# Altium PCB STM32H743_PCB.PcbDoc (part 1 of 2)
Units mm, origin at the board's own origin, x right, y up, seen from the top; angles counter-clockwise.
Board outline 65 x 50 mm, 4 copper layers (Top, Signal, GND, Bottom), stack 0.603 mm thick; 86 components, 110 nets, 449 pads, 169 vias.
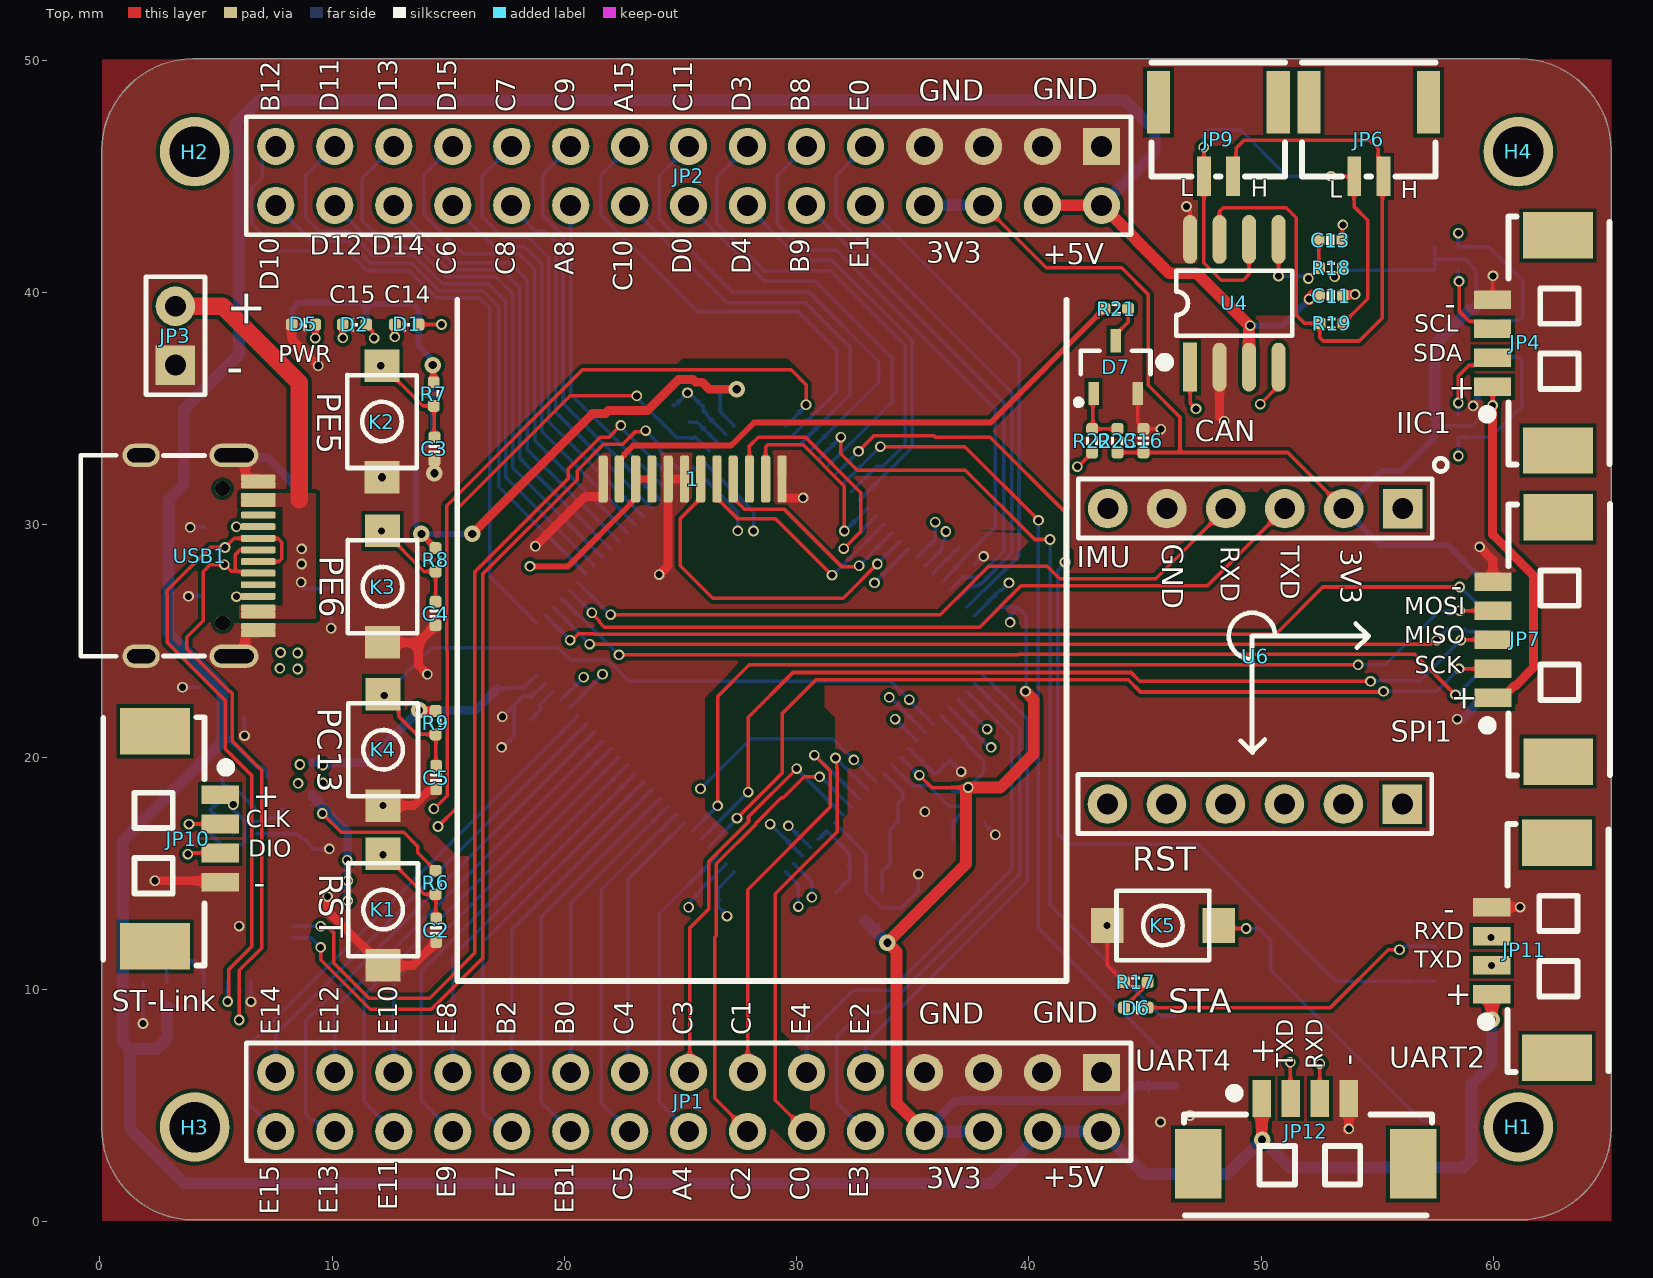
[diagram p0: Top view]
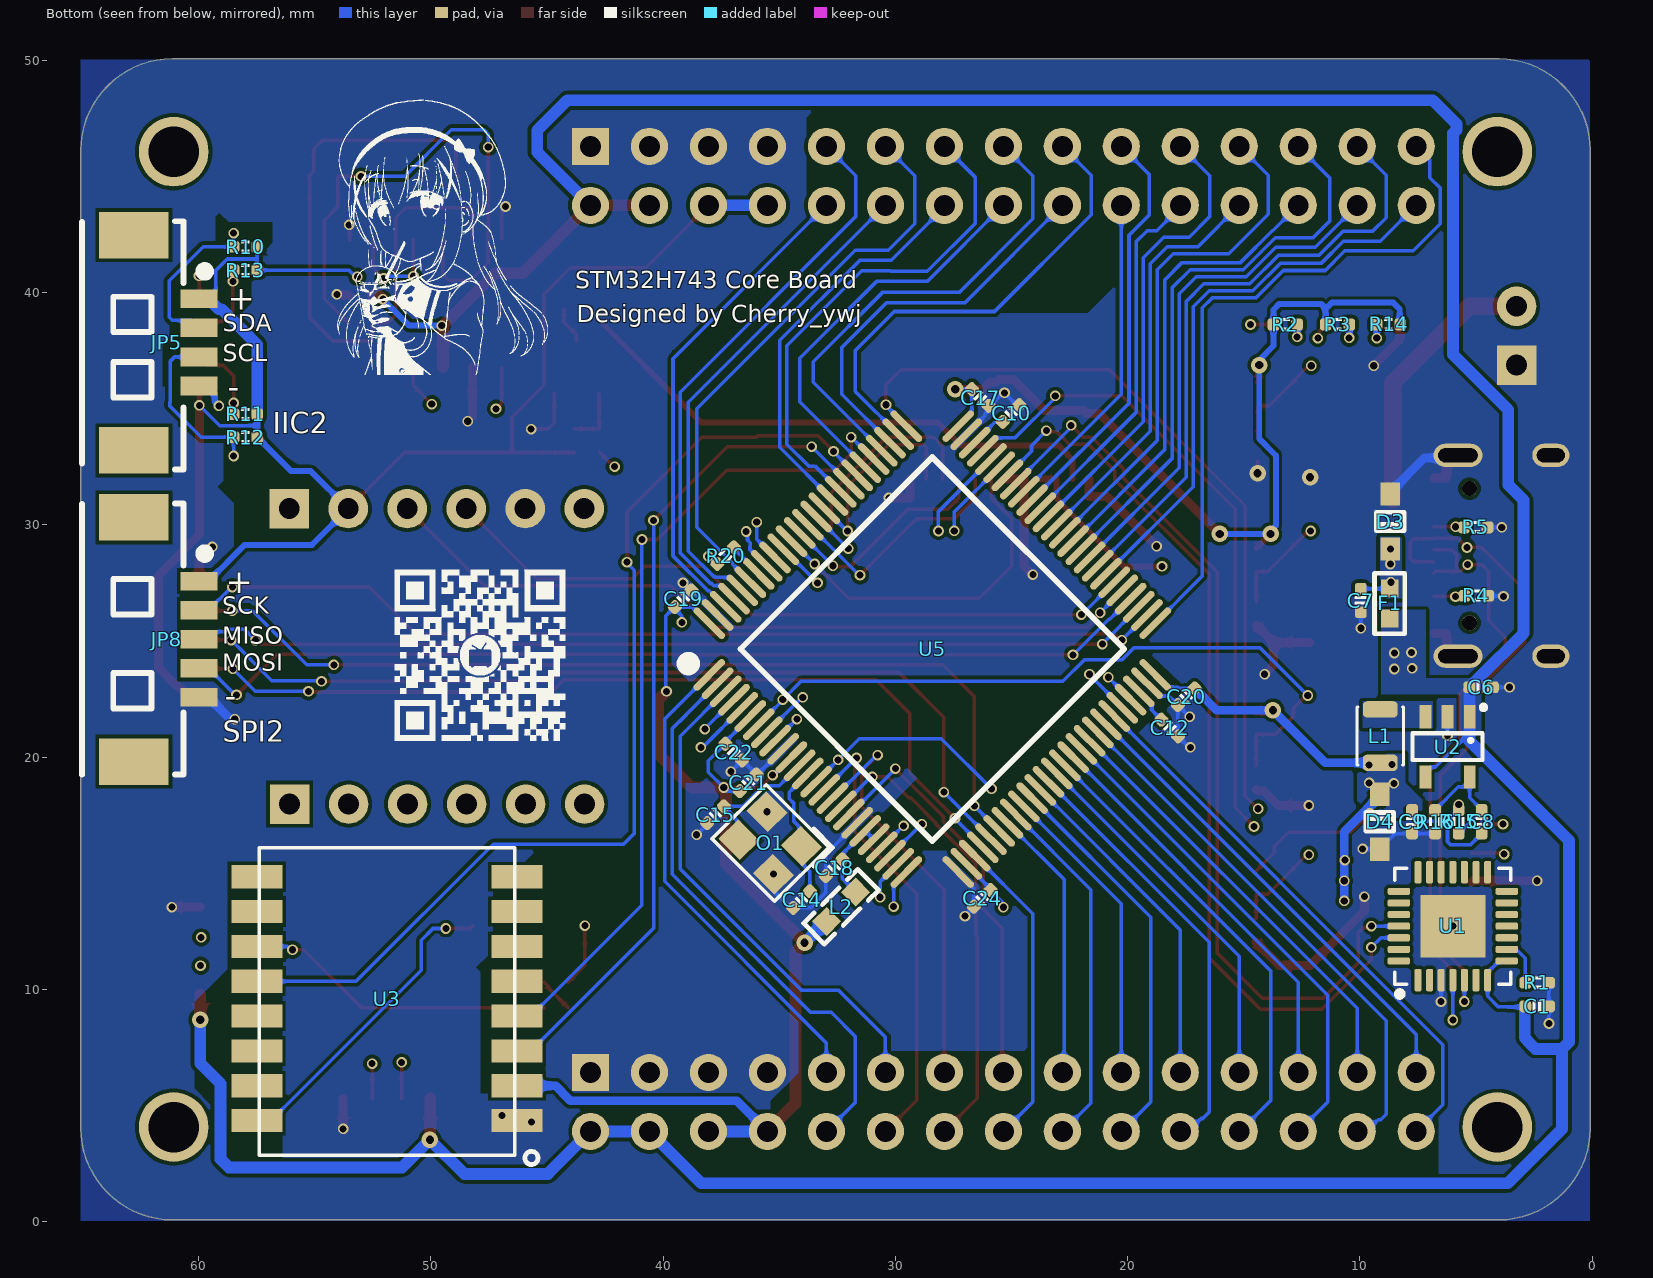
[diagram p1: Bottom view, seen from below]
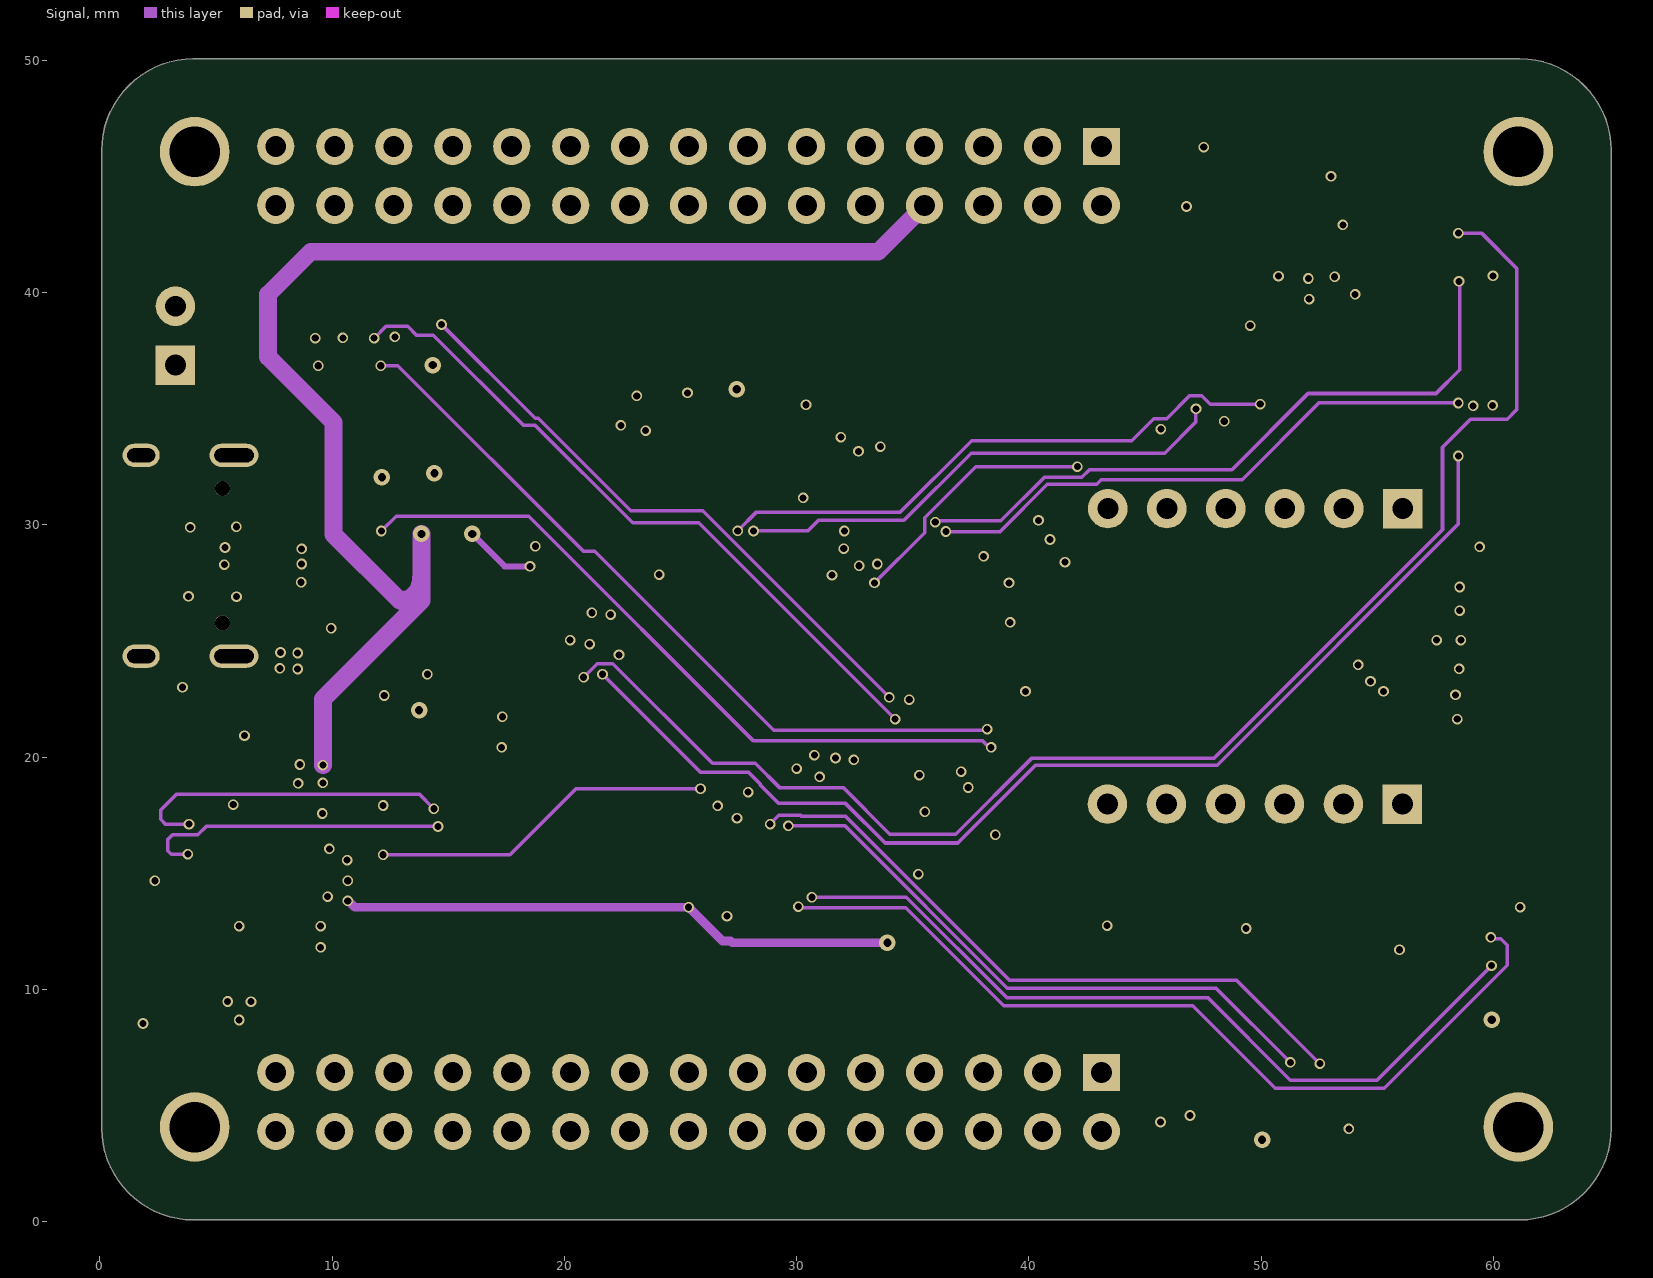
[diagram p2: Signal]
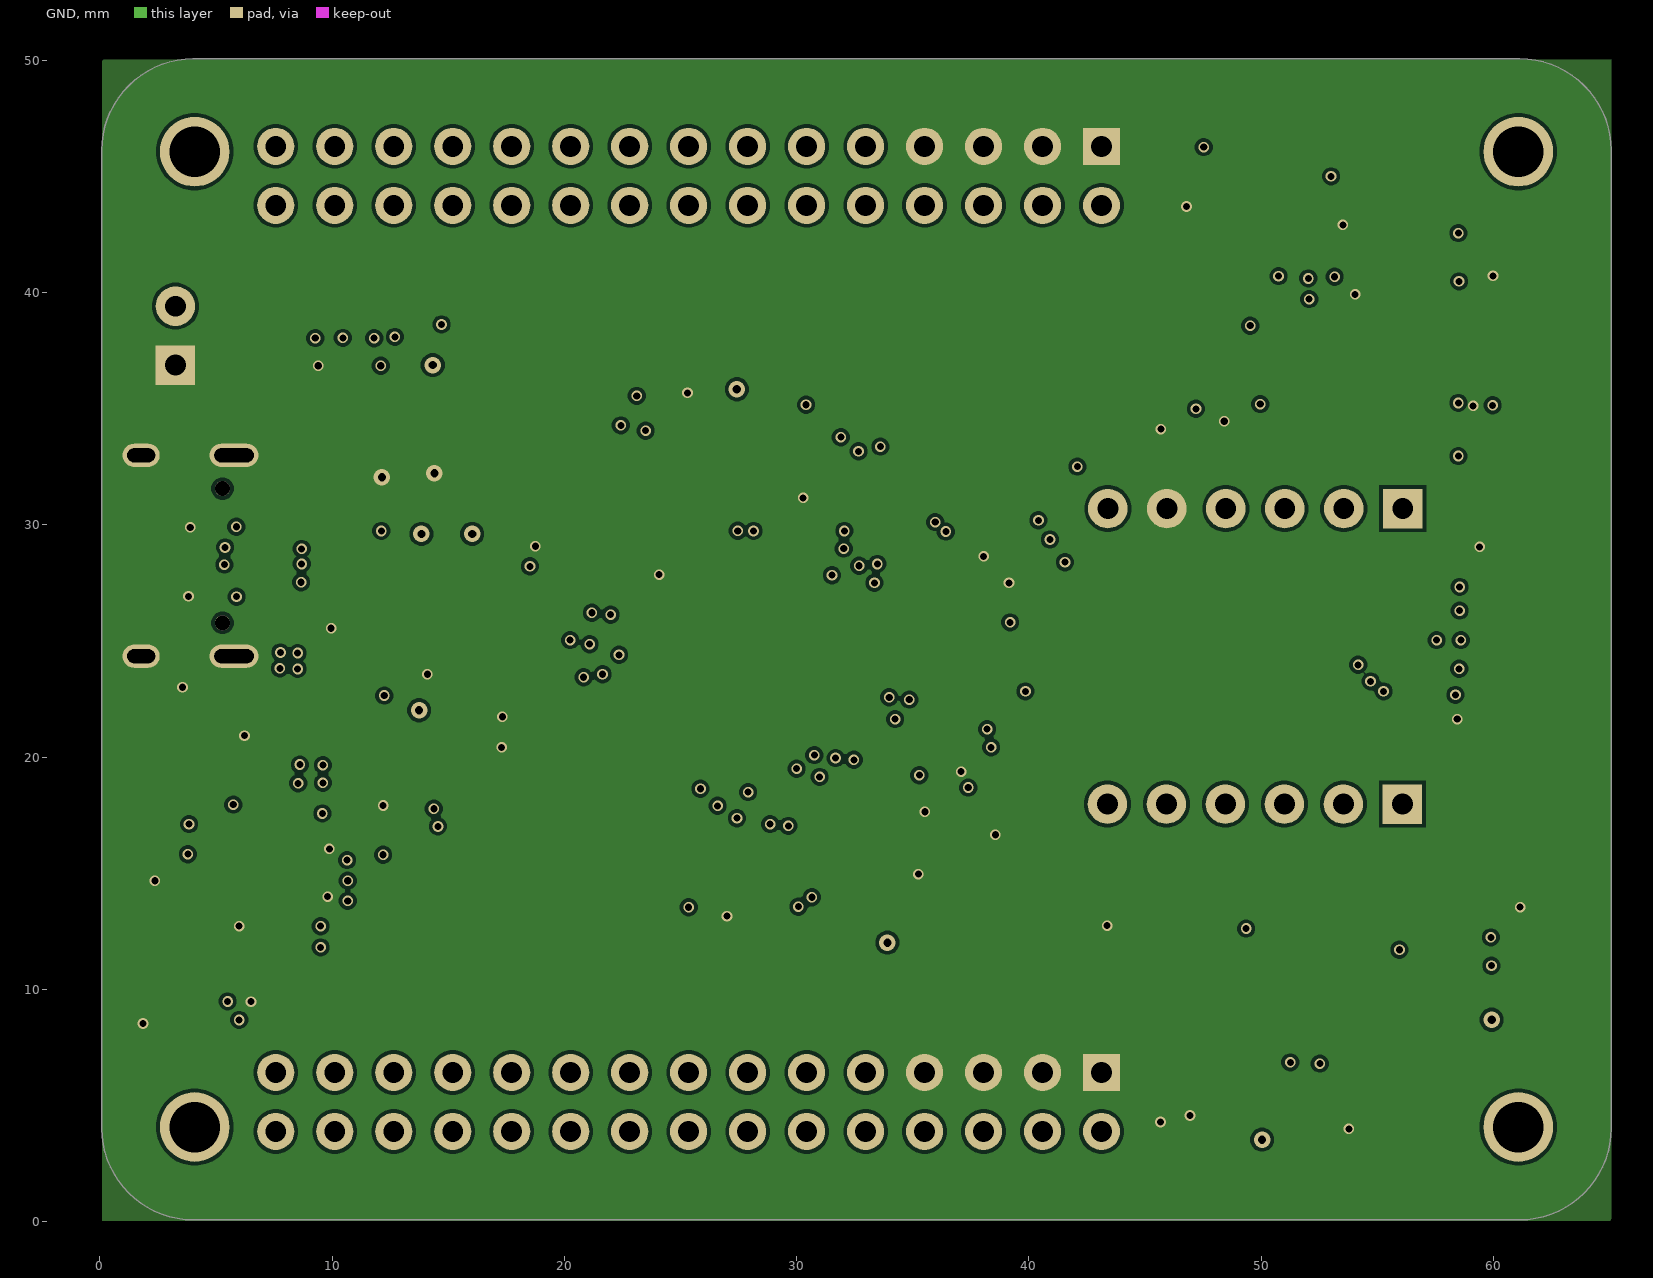
[diagram p3: GND]

## Layer stack, top to bottom
Top Solder: solder mask 0.0102, Solder Resist, Dk 3.5
Top: signal copper 0.0356
Dielectric 2: prepreg 0.0711, PP-006, Dk 4.1
Signal: signal copper 0.035
Dielectric 1: dielectric 0.32, FR-4, Dk 4.8
GND: signal copper 0.035
Dielectric 3: prepreg 0.0711, PP-006, Dk 4.1
Bottom: signal copper 0.0356
Bottom Solder: solder mask 0.0102, Solder Resist, Dk 3.5

## Board outline
0.076,4.012 0.076,46.138 cw(c4.038,46.114) 4.012,50.076 61.14,50.076 61.138,50.076 cw(c61.114,46.114) 65.076,46.14 65.076,4.014 cw(c61.114,4.038) 61.14,0.076 4.012,0.076 4.014,0.076 cw(c4.038,4.038)

## Design rules (kind name [scope] priority, off if disabled: settings)
Clearance [All] p1: gap=0.152 ignorepadtopadclearanceinfootprint=TRUE except(0: Arc-Hole Track-Hole SMDPad-Hole THPad-Hole Via-Hole Fill-Hole Poly-Hole Region-Hole Text-Hole)
PlaneConnect [All] p1: planeconnectstyle=Direct reliefexpansion=0.508 reliefentries=4 reliefconductorwidth=0.254 reliefairgap=0.254
PolygonConnect [All] p1: connectstyle=Direct reliefconductorwidth=0.254 reliefentries=4 polygonreliefangle="90 Angle" airgapwidth=0.254
RoutingVias [All] p1: holewidth=0.711 width=1.27 viastyle="Through Hole" minholewidth=0.305 minwidth=0.457 maxholewidth=0.711 maxwidth=1.27
SilkToSilkClearance [All] p1: silktosilkclearance=0
SolderMaskExpansion [All] p1: expansion=0.102 istentingtop=FALSE
Width [All] p1: maxlimit=1.27 minlimit=0.152 preferedwidth=0.152
28 further rules are at their usual default settings.

## Classes and differential pairs
net class Extend: PA4 PA8 PA15 PB0 PB1 PB2 PB8 PB9 PB12 PC0 PC1 PC2 PC3 PC4 PC5 PC6 PC7 PC8 PC9 PC10 PC11 PD0 PD3 PD4 PD10 PD11 PD12 PD13 PD14 PD15 PE0 PE1 PE2 PE3 PE4 PE7 PE8 PE9 PE10 PE11 PE12 PE13 PE14 PE15
net class Interface: BLE_KEY CAN_RX CAN_TX CANH CANL I2C1_SCL I2C1_SDA I2C2_SCL I2C2_SDA KEY1 KEY2 KEY3 LED1 LED2 SPI1_MISO SPI1_MOSI SPI1_SCK SPI2_MISO SPI2_MOSI SPI2_SCK SPI3_MOSI SPI3_SCK SWCLK SWDIO TFT_BLK TFT_CS TFT_DC TFT_RES UART1_RX UART1_TX UART2_RX UART2_TX UART3_RX UART3_TX UART4_RX UART4_TX UART5_RX UART5_TX USB_DN USB_DP
net class VCC: 3V3 +5V VBUS
net class GND: GND

## Components (designator, comment, footprint, x,y, rotation, side; value= is the part's Value field where it differs from the comment)
1 "LCD-240x240" LCD-240X240-NOHOLE 28.829,27.483 r180 top
C1 "0.1uF" CAP_0402 2.362,9.271 r180 bottom
C2 "0.1uF" CAP_0402 14.478,12.548 r90 top
C3 "0.1uF" CAP_0402 14.402,33.274 r90 top
C4 "0.1uF" CAP_0402 14.453,26.187 r90 top
C5 "0.1uF" CAP_0402 14.478,19.126 r90 top
C6 "10uF" CAP_0402 4.775,23.012 r0 bottom
C7 "10uF" CAP_0402 9.957,26.746 r90 bottom
C8 "22pF" CAP_0402 4.75,17.221 r270 bottom
C9 "10uF" CAP_0402 7.747,17.221 r90 bottom
C10 "2.2uF" CAP_0402 25.015,34.802 r315 bottom
C11 "0.1uF" CAP_0402 53.01,39.878 r180 top
C12 "2.2uF" CAP_0402 18.186,21.26 r45 bottom
C13 "0.1uF" CAP_0402 52.984,42.266 r0 top
C14 "9pF" CAP_0402 34.036,13.868 r135 bottom
C15 "9pF" CAP_0402 37.744,17.526 r135 bottom
C16 "0.1uF" CAP_0402 44.933,33.63 r90 top
C17 "0.1uF" CAP_0402 26.343,35.487 r45 bottom
C18 "0.1uF" CAP_0402 32.635,15.244 r315 bottom
C19 "0.1uF" CAP_0402 39.138,26.826 r315 bottom
C20 "0.1uF" CAP_0402 17.475,22.606 r135 bottom
C21 "0.1uF" CAP_0402 36.338,18.898 r315 bottom
C22 "0.1uF" CAP_0402 36.961,20.222 r45 bottom
C24 "0.1uF" CAP_0402 26.26,13.923 r135 bottom
D1 "LED" LED_0402_RED 13.208,38.633 r0 top
D2 "LED" LED_0402_RED 10.96,38.633 r0 top
D3 "LESD3Z5.0CMT1G" SOD-323 8.687,30.15 r90 bottom
D4 "LESD3Z5.0CMT1G" SOD-323 9.144,17.221 r270 bottom
D5 "LED" LED_0402_RED 8.763,38.633 r180 top
D6 "LED" LED_0402_RED 44.602,9.22 r180 top
D7 "S8050" SOT23-3L 43.739,36.805 r0 top
F1 "S0603-F-2.0A" "R 0603" 8.712,26.619 r270 bottom
H1 "Hole" HOLE 61.076,4.076 r0 top
H2 "Hole" HOLE 4.076,46.076 r0 top
H3 "Hole" HOLE 4.076,4.076 r0 top
H4 "Hole" HOLE 61.076,46.076 r0 top
JP1 "Header 2X11" HDR2.54-LI-2x15P 25.349,5.156 r180 top
JP2 "Header 2X11" HDR2.54-LI-2x15P 25.349,45.034 r180 top
JP3 "HDR-1X2" HDR2.54-LI-2P 3.251,38.151 r90 top
JP4 "HDR-1X4" "MX 1.25-WS-4P" 62.78,37.839 r90 top
JP5 "HDR-1X4" "MX 1.25-WS-4P" 62.789,37.846 r270 bottom
JP6 "HDR-1X2" GH1.25-WT-2P 54.635,46.609 r180 top
JP7 "HDR-1X5" "MX 1.25-WS-5P" 62.789,25.07 r90 top
JP8 "HDR-1X5" "MX 1.25-WS-5P" 62.789,25.07 r270 bottom
JP9 "HDR-1X2" GH1.25-WT-2P 48.158,46.609 r180 top
JP10 "HDR-1X4" "MX 1.25-WS-4P" 2.371,16.486 r270 top
JP11 "HDR-1X4" "MX 1.25-WS-4P" 62.738,11.684 r90 top
JP12 "HDR-1X4" "MX 1.25-WS-4P" 51.918,2.489 r0 top
K1 "TACT 2P" KEY 12.192,13.437 r270 top value=3x4
K2 "TACT 2P" KEY 12.141,34.455 r270 top value=3x4
K3 "TACT 2P" KEY 12.167,27.343 r270 top value=3x4
K4 "TACT 2P" KEY 12.192,20.32 r270 top value=3x4
K5 "TACT 2P" KEY 45.771,12.751 r180 top value=3x4
L1 "2.2uH" 2520-L 9.119,20.911 r270 bottom
L2 "磁珠" "L 0603" 32.334,13.564 r315 bottom
O1 "无源晶振" "OSC 3225-4P" 35.382,16.307 r45 bottom
R1 "210K" RES_0402 2.362,10.287 r180 bottom
R2 "3K" RES_0402 13.208,38.633 r0 bottom
R3 "3K" RES_0402 10.96,38.633 r0 bottom
R4 "5.1K" RES_0402 4.978,26.949 r0 bottom
R5 "5.1K" RES_0402 5.004,29.896 r0 bottom
R6 "10K" RES_0402 14.453,14.605 r90 top
R7 "10K" RES_0402 14.376,35.636 r90 top
R8 "10K" RES_0402 14.453,28.499 r90 top
R9 "10K" RES_0402 14.453,21.488 r90 top
R10 "10K" RES_0402 57.988,41.978 r180 bottom
R11 "10K" RES_0402 57.988,34.773 r180 bottom
R12 "10K" RES_0402 57.988,33.782 r180 bottom
R13 "10K" RES_0402 57.988,40.97 r180 bottom
R14 "2K" RES_0402 8.763,38.633 r180 bottom
R15 "680K" RES_0402 5.74,17.221 r90 bottom
R16 "150K" RES_0402 6.756,17.221 r90 bottom
R17 "1K" RES_0402 44.602,10.312 r0 top
R18 "10K" RES_0402 53.01,41.072 r180 top
R19 "120R" RES_0402 53.035,38.684 r180 top
R20 "100K" RES_0402 37.309,28.68 r315 bottom
R21 "10R" RES_0402 43.764,39.319 r0 top
R22 "1K" RES_0402 42.723,33.63 r270 top
R23 "10K" RES_0402 43.815,33.63 r270 top
U1 "CP2102" QFN-28 5.994,12.725 r90 bottom value=Value
U2 "TLV62569" SOT23-5N 6.223,20.447 r0 bottom
U3 "TJA1050T/CM,118" HC-04-S 52.146,8.712 r0 bottom
U4 "TJA1050T/CM,118" SOP8 48.844,39.548 r90 top
U5 "STM32H743VIT6_C114409" LQFP100-14*14 28.409,24.657 r225 bottom
U6 "IMU" IMU 49.733,17.983 r180 top
USB1 "Type-C" Type-C-TOP 4.293,28.677 r180 top

## Footprints (in the part's own frame and the unit in brackets; to place one, negate y for a bottom-side part, rotate by r counter-clockwise, add the part's x,y. Pads: shape width x height; smd on the part's side, far side on the other; paste and mask are expansions set on the pad)
2520-L [mm]
  rrect50% 0.7x1.5 smd: 1(-1.15,0) 2(1.15,0)
  silkscreen extent -1.25,-1 1.25,1, body extent -1,-0.6 1,0.6, height 0.92
CAP_0402 [mil]
  rrect50% 20x20 smd: 1(-20,0) 2(20,0)
  silkscreen extent -7,-9 7,9, body extent -20,-10 20,10, height 20
GH1.25-WT-2P [mm] "GH1.25 2P 卧贴插座                   联系卖家 免费查找封装"
  rect 0.6x1.7 smd: 1(0.625,1.6) 2(-0.625,1.6)
  rect 1x2.7 smd: 3(2.575,-1.6) 4(-2.575,-1.6)
  silkscreen extent -2.88,-3.3 2.87,1.6, body extent -2.87,-2.86 2.87,2, height 4.26
HC-04-S [mm]
  rect 2.2x1 smd: 1(-5.854,4.361) 2(-5.854,2.861) 3(-5.854,1.361) 4(-5.854,-0.139) 5(-5.854,-1.639) 6(-5.854,-3.139) 7(-5.854,-4.639) 8(-5.854,-6.139) 9(5.346,-6.139) 10(5.346,-4.639) 11(5.346,-3.139) 12(5.346,-1.639) 13(5.346,-0.139) 14(5.346,1.361) 15(5.346,2.861) 16(5.346,4.361)
  silkscreen extent -6.76,-7.39 5.25,6.25, body extent -5.71,-7.37 5.21,11.18, height 2
HDR2.54-LI-2P [mm] "排针，2脚"
  rect 1.7x1.7 hole 0.9: 1(-1.27,0)
  round 1.7 hole 0.9: 2(1.27,0)
  silkscreen extent -2.54,-1.27 2.54,1.27, body extent -2.54,-1.27 2.54,1.27, height 8.5
HDR2.54-LI-2x15P [mm] "双排排针，15x2脚"
  rect 1.6x1.6 hole 0.9: 1(-17.78,-1.27)
  round 1.6 hole 0.9: 2(-17.78,1.27) 3(-15.24,-1.27) 4(-15.24,1.27) 5(-12.7,-1.27) 6(-12.7,1.27) 7(-10.16,-1.27) 8(-10.16,1.27) 9(-7.62,-1.27) 10(-7.62,1.27) 11(-5.08,-1.27) 12(-5.08,1.27) 13(-2.54,-1.27) 14(-2.54,1.27) 15(0,-1.27) 16(0,1.27) 17(2.54,-1.27) 18(2.54,1.27) 19(5.08,-1.27) 20(5.08,1.27) 21(7.62,-1.27) 22(7.62,1.27) 23(10.16,-1.27) 24(10.16,1.27) 25(12.7,-1.27) 26(12.7,1.27) 27(15.24,-1.27) 28(15.24,1.27) 29(17.78,-1.27) 30(17.78,1.27)
  silkscreen extent -19.05,-2.54 19.05,2.54, body extent -19.05,-2.54 19.05,2.54, height 8.5
HOLE [mm] "M3铜柱，长：4mm"
  round 3 hole 2.175: 1(0,0)
IMU [mm] "陀螺仪接口"
  rect 1.7x1.7 hole 0.9: 1(-6.365,-12.724) 12(-6.35,0)
  round 1.7 hole 0.9: 2(-3.825,-12.724) 3(-1.285,-12.724) 4(1.255,-12.724) 5(3.795,-12.724) 6(6.335,-12.724) 7(6.35,0) 8(3.81,0) 9(1.27,0) 10(-1.27,0) 11(-3.81,0)
  silkscreen extent -8.28,-14.89 7.62,1.27, body extent -7.64,-13.99 7.62,1.27, height 8.5
KEY [mm]
  rect 1.4x1.5 smd: 1(-2.4,0) 2(2.4,0)
  silkscreen extent -2.01,-1.5 2,1.5, body extent -2.11,-1.28 1.89,1.22, height 1.6
"L 0603" [mil] "小功率贴片电感"
  rect 35x35 smd: 1(-35,0) 2(35,0)
  silkscreen extent -65,-25 65,25, body extent -31,-16 31,16, height 31
LCD-240X240-NOHOLE [mil]
  rrect50% 15.75x80 smd: 1(282,-177) 2(254.44,-177) 3(226.88,-177) 4(199.32,-177) 5(171.76,-177) 6(144.2,-177) 7(116.65,-177) 8(89.09,-177) 9(61.53,-177) 10(33.97,-177) 11(6.41,-177) 12(-21.15,-177)
  silkscreen extent -504,-481 529,674, body extent -505,-490 530,675, height 39
LED_0402_RED [mil]
  rrect50% 20x20 smd: 1(-20,0) 2(20,0)
  silkscreen extent -6,-10 6,10, body extent -20,-10 20,10, height 18
LQFP100-14*14 [mm] "14x14mm，0.5mm（蒜米工坊）"
  oval 0.3x1.8 smd: 1(-6,-7.575) 2(-5.5,-7.575) 3(-5,-7.575) 4(-4.5,-7.575) 5(-4,-7.575) 6(-3.5,-7.575) 7(-3,-7.575) 8(-2.5,-7.575) 9(-2,-7.575) 10(-1.5,-7.575) 11(-1,-7.575) 12(-0.5,-7.575) 13(0,-7.575) 14(0.5,-7.575) 15(1,-7.575) 16(1.5,-7.575) 17(2,-7.575) 18(2.5,-7.575) 19(3,-7.575) 20(3.5,-7.575) 21(4,-7.575) 22(4.5,-7.575) 23(5,-7.575) 24(5.5,-7.575) 25(6,-7.575) 51(6,7.575) 52(5.5,7.575) 53(5,7.575) 54(4.5,7.575) 55(4,7.575) 56(3.5,7.575) 57(3,7.575) 58(2.5,7.575) 59(2,7.575) 60(1.5,7.575) 61(1,7.575) 62(0.5,7.575) 63(0,7.575) 64(-0.5,7.575) 65(-1,7.575) 66(-1.5,7.575) 67(-2,7.575) 68(-2.5,7.575) 69(-3,7.575) 70(-3.5,7.575) 71(-4,7.575) 72(-4.5,7.575) 73(-5,7.575) 74(-5.5,7.575) 75(-6,7.575)
  oval 1.8x0.3 smd: 26(7.576,-6) 27(7.576,-5.5) 28(7.576,-5) 29(7.576,-4.5) 30(7.576,-4) 31(7.576,-3.5) 32(7.576,-3) 33(7.576,-2.5) 34(7.576,-2) 35(7.576,-1.5) 36(7.576,-1) 37(7.576,-0.5) 38(7.576,0) 39(7.576,0.5) 40(7.576,1) 41(7.576,1.5) 42(7.576,2) 43(7.576,2.5) 44(7.576,3) 45(7.576,3.5) 46(7.576,4) 47(7.576,4.5) 48(7.576,5) 49(7.576,5.5) 50(7.576,6) 76(-7.575,6) 77(-7.575,5.5) 78(-7.575,5) 79(-7.575,4.5) 80(-7.575,4) 81(-7.575,3.5) 82(-7.575,3) 83(-7.575,2.5) 84(-7.575,2) 85(-7.575,1.5) 86(-7.575,1) 87(-7.575,0.5) 88(-7.575,0) 89(-7.575,-0.5) 90(-7.575,-1) 91(-7.575,-1.5) 92(-7.575,-2) 93(-7.575,-2.5) 94(-7.575,-3) 95(-7.575,-3.5) 96(-7.575,-4) 97(-7.575,-4.5) 98(-7.575,-5) 99(-7.575,-5.5) 100(-7.575,-6)
  silkscreen extent -7.23,-8.12 5.84,5.84, body extent -8,-8 8,8, height 1.45
"MX 1.25-WS-4P" [mm] "长：10.15mm，宽：4.2mm，高：3.4mm"
  rect 2x3 smd: 0(-4.632,0) 0(4.632,0)
  rect 0.8x1.6 smd: 1(-1.889,2.811) 2(-0.639,2.811) 3(0.611,2.811) 4(1.861,2.811)
  silkscreen extent -5.23,-2.23 5.45,3.25, body extent -5.07,-2.1 5.07,3.09, height 3.4
"MX 1.25-WS-5P" [mm] "长：11.4mm，宽：4.2mm，高：3.4mm"
  rect 2x3 smd: 0(-5.257,0) 0(5.257,0)
  rect 0.8x1.6 smd: 1(-2.514,2.811) 2(-1.264,2.811) 3(-0.014,2.811) 4(1.236,2.811) 5(2.486,2.811)
  silkscreen extent -5.86,-2.23 5.83,3.25, body extent -5.7,-2.1 5.7,3.09, height 3.4
"OSC 3225-4P" [mm] "3.2*2.5*0.7mm(长宽高)"
  rect 1.3x1.2 smd: 1(-1.05,-0.85) 2(1.05,-0.85) 3(1.05,0.85) 4(-1.05,0.85)
  silkscreen extent -2.03,-1.75 1.9,1.65, body extent -1.6,-1.25 1.6,1.25, height 0.7
QFN-28 [mil]
  rrect50% 38x12 smd mask+5: 1(-91.5,59.06) 2(-91.5,39.37) 3(-91.5,19.68) 4(-91.5,0) 5(-91.5,-19.68) 6(-91.5,-39.37) 7(-91.5,-59.06) 15(91.5,-59.06) 16(91.5,-39.37) 17(91.5,-19.68) 18(91.5,0) 19(91.5,19.68) 20(91.5,39.37) 21(91.5,59.06)
  rrect50% 12x38 smd mask+5: 8(-59.06,-91.5) 9(-39.37,-91.5) 10(-19.68,-91.5) 11(0,-91.5) 12(19.68,-91.5) 13(39.37,-91.5) 14(59.06,-91.5) 22(59.06,91.5) 23(39.37,91.5) 24(19.68,91.5) 25(0,91.5) 26(-19.68,91.5) 27(-39.37,91.5) 28(-59.06,91.5)
  rect 106.3x110.24 smd: 29(0,0)
  silkscreen extent -120,-98 98,98, body extent -99,-99 98,98, height 35
"R 0603" [mil] "1/10W贴片电阻"
  rect 30x30 smd: 1(-25.59,0) 2(25.59,0)
  silkscreen extent -51,-26 51,26, body extent -31,-16 31,16, height 16
RES_0402 [mil]
  rrect50% 20x20 smd: 1(-20,0) 2(20,0)
  silkscreen extent -7,-10 7,10, body extent -20,-10 20,10, height 14
SOD-323 [mm]
  rect 1x0.83 smd: 1(1.18,0) 2(-1.18,0)
  silkscreen extent -0.4,-0.6 0.4,0.6, body extent -1.35,-0.63 1.35,0.63, height 1.1
SOP8 [mm] "5*6*1.8mm（长宽高）"
  rect 2.1x0.6 smd: 1(-2.75,1.905)
  oval 2.1x0.6 smd: 2(-2.75,0.635) 3(-2.75,-0.635) 4(-2.75,-1.905) 5(2.75,-1.905) 6(2.75,-0.635) 7(2.75,0.635) 8(2.75,1.905)
  silkscreen extent -2.69,-2.5 1.4,3.15, body extent -3,-2.5 3,2.5, height 1.9
SOT23-3L [mm] "3x1.3x1mm(长宽高)"
  rect 0.45x1 smd: 1(-0.95,-1.143) 2(0.95,-1.143) 3(0,1.125)
  silkscreen extent -1.72,-1.65 1.5,0.7, body extent -1.5,-1.2 1.5,1.2, height 1.05
SOT23-5N [mm] "3x1.6x1.1mm(长宽高)"
  rect 0.5x1 smd: 1(-0.95,-1.3) 2(0,-1.3) 3(0.95,-1.3) 4(0.95,1.3) 5(-0.95,1.3)
  silkscreen extent -1.63,-1.78 1.5,0.56, body extent -1.5,-1.4 1.5,1.4, height 1.15
Type-C-TOP [mm]
  round 0.65 hole 0.65: 0(-0.98,2.89) 0(-0.98,-2.89)
  oval 1.6x1 hole 0.6 slot 1.2 at 0 deg: 1(2.52,4.325) 2(2.52,-4.325)
  oval 2.1x1 hole 0.6 slot 1.7 at 0 deg: 3(-1.48,-4.325) 4(-1.48,4.325)
  rrect50% 1.5x0.3 smd: A1(-2.52,-3.35) A4(-2.52,-2.55) A5(-2.52,-1.25) A6(-2.52,-0.25) A7(-2.52,0.25) A8(-2.52,1.25) A9(-2.52,2.55) A12(-2.52,3.35) B1(-2.52,3.05) B4(-2.52,2.25) B5(-2.52,1.75) B6(-2.52,0.75) B7(-2.52,-0.75) B8(-2.52,-1.75) B9(-2.52,-2.25) B12(-2.52,-3.05)
  silkscreen extent -0.22,-4.33 5.12,4.33, body extent -2.57,-4.48 5.18,4.48, height 3.26

## Part data
1: "显示屏"
C1 C2 C3 C4 C5 C6 C7 C8 C9 C10 C11 C12 C13 C14 C15 C16 C17 C18 C19 C20 C21 C22 C24: library part Capacitor
D3 D4: JLCPCB Part Class="Extended Part", Manufacturer=LRC(乐山无线电), Add into BOM=yes, Convert to PCB=yes, Datasheet=https://atta.szlcsc.com/upload/public/pdf/source/20180130/C172405_15172974194641323435.pdf, Device=LESD3Z5.0CMT1G, LCSC Part Name=LESD3Z5.0CMT1G, Manufacturer Part=LESD3Z5.0CMT1G, Name=LESD3Z5.0CMT1G, Supplier=LCSC, Supplier Footprint=SOD-323, Supplier Part=C172405, Symbol=LESD3Z5.0CMT1G
D7: library part 三极管-NPN
F1: Breaking Capacity=50A, Current Rating=2A, JLCPCB Part Class="Extended Part", Manufacturer=SART(萨特), Operating Temperature=-55℃~+125℃, Voltage Rating (DC)=32V, Add into BOM=yes, Convert to PCB=yes, Datasheet=https://atta.szlcsc.com/upload/public/pdf/source/20200518/C553908_4D61F2393DF2DB676B920346B02237E6.pdf, Device=S0603-F-2.0A, LCSC Part Name=S0603-F-2.0A, Manufacturer Part=S0603-F-2.0A, Name=S0603-F-2.0A, Supplier=LCSC, Supplier Footprint=0603, Supplier Part=C553908, Symbol=S0603-F-2.0A, Type=贴片式陶瓷保险丝
JP1 JP2: library part "Header 15X2", "15*2P接插件", BOM名称=15*2P接插件, 学习资源=www.ooocke.com, 版权归属=源创客
JP3 JP6 JP9: library part "Header 2", "2P接插件", BOM名称=2P接插件, 学习资源=www.ooocke.com, 版权归属=源创客
JP4 JP5 JP10 JP11 JP12: library part "Header 4", "4P接插件", BOM名称=4P接插件, 学习资源=www.ooocke.com, 版权归属=源创客
JP7 JP8: library part "Header 5", "5P接插件", BOM名称=5P接插件, 学习资源=www.ooocke.com, 版权归属=源创客
K1 K2 K3 K4 K5: library part ButtonTACT_3x4x2_180, "Button", Type="TACT 2P"
L1 L2: library part Inductance
R1 R2 R3 R4 R5 R6 R7 R8 R9 R10 R11 R12 R13 R14 R15 R16 R17 R18 R19 R20 R21 R22 R23: library part Resistor
U1: "USB转TTL", MFG #1="SILICON LABS", PART DESC="SINGLE-CHIP USB TO UART BRIDGE, QFN28, RoHS.", PART NUMBER=CP2102, RefDes=RefDes, Type=DEV
U3: library part HC-04-S, JLCPCB Part Class="Basic Part", LCSC Part Name=4.75V~5.25V, Manufacturer=NXP(恩智浦), Supply Current=50mA, Add into BOM=yes, Convert to PCB=yes, Datasheet=https://atta.szlcsc.com/upload/public/pdf/source/20140411/1457707042917.pdf, Device=TJA1050T/CM,118, Manufacturer Part=TJA1050T/CM,118, Name=TJA1050T/CM,118, Supplier=LCSC, Supplier Footprint=SOIC-8, Supplier Part=C6952, Supply Voltage=4.75V~5.25V, Symbol=TJA1050T/CM,118, Type=收发器
U4: JLCPCB Part Class="Basic Part", LCSC Part Name=4.75V~5.25V, Manufacturer=NXP(恩智浦), Supply Current=50mA, Add into BOM=yes, Convert to PCB=yes, Datasheet=https://atta.szlcsc.com/upload/public/pdf/source/20140411/1457707042917.pdf, Device=TJA1050T/CM,118, Manufacturer Part=TJA1050T/CM,118, Name=TJA1050T/CM,118, Supplier=LCSC, Supplier Footprint=SOIC-8, Supplier Part=C6952, Supply Voltage=4.75V~5.25V, Symbol=TJA1050T/CM,118, Type=收发器
U5: JLCPCB Part Class="Extended Part", LCSC Part Name=480MHz, Low-Voltage Detect=有, Manufacturer=ST(意法半导体), Manufacturer Part=STM32H743VIT6, Operating Temperature Range=-40℃~+85℃, Operating Voltage Range=1.71V~3.6V, ADC (Bit)=16bit, Add into BOM=yes, Convert to PCB=yes, CPU Maximum Speed=480MHz, DAC (Bit)=12bit, Datasheet=https://atta.szlcsc.com/upload/public/pdf/source/20200508/C529058_DA70143F266D6D825C3A912656F12A87.pdf, Device=STM32H743VIT6_C114409, Direct Memory Access=有, GPIO Ports Number=82, Infrared Data Association=有, Internal Oscillator=有, LCD Module=有, Name=STM32H743VIT6, Program Storage Size=2MB, Secure Digital Input and Output=有, Supplier=LCSC, Supplier Footprint=LQFP-100(14x14), Supplier Part=C114409, Symbol=STM32H743VIT6_C114409, Universal Serial Bus=有, Watchdog=有
USB1: library part USB-Type-C-TOP

## Via types
v1: diameter 0.457, hole 0.305, Top to Bottom, 159 vias
v2: diameter 0.711, hole 0.356, Top to Bottom, 10 vias

## Nets (pads, with @x,y where several pads share a name; then routed paths per layer and width w, separated by ;. In a path a pad name is that pad's centre, name@x,y a point inside that pad or via, vN(x,y) a via of type N, cw(c..) or ccw(c..) an arc to the next point about the centre after c; other vN are vias at no path point)
3V3: 1.3 1.4 C8.2 C9.2 C16.1 C17.2 C19.2 C20.2 C21.2 C22.2 C24.2 D4.2 JP1.6 JP1.8 JP2.6 JP2.8 JP4.1 JP5.1 JP7.1 JP8.1 JP10.1 L1.2 L2.2 R2.2 R3.2 R6.2 R7.2 R8.2 R9.2 R10.2 R11.2 R12.2 R13.2 R14.2 R15.2 R18.1 R23.2 U3.2 U5.6 U5.11 U5.27 U5.50 U5.75 U5.100 U6.2 | length 291.3
  Top w0.152: v1(9.576,17.577) 10.387,16.765 13.037,16.765 13.038,16.764 13.081,16.764 13.687,16.158 13.687,15.879 R6.2@14.453,15.113 ; v1(35.281,19.228) 35.814,18.694 v1(37.389,18.694) ; JP2.6@38.049,43.764 40.742,41.072 43.993,41.072 45.142,39.922 45.142,36.011 46.507,34.646 46.507,33.122 ; R23.2@43.815,33.122 C16.1@44.933,33.122 46.507,33.122 ; U6.2@53.558,30.707 51.144,33.122 46.507,33.122 ; v1(59.969,35.154) JP4.1@59.969,35.95
  Top w0.254: v2@13.843,29.667 v2(13.843,29.616) R8.2@14.453,29.007 ; v2(14.33,36.885) 14.353,36.862 14.353,36.167 R7.2@14.376,36.144 ; v1(18.517,28.219) 20.16,28.219 22.846,30.905 22.846,30.942 23.066,31.163 1.3@23.066,31.979 1.4@23.766,31.979
  Top w0.381: v2(13.741,22.022) 13.754,22.009 14.44,22.009 R9.2@14.453,21.996 ; v2(16.027,29.616) 21.209,34.798 21.768,34.798 21.895,34.925 23.571,34.925 24.905,36.258 25.535,36.258 25.649,36.144 25.933,36.144 26.231,35.847 v2(27.425,35.847) ; v1(59.969,35.154) 59.969,29.591 61.722,27.838 61.722,23.851 60.934,23.063 60.885,23.063 60.378,22.556 JP7.1@59.978,22.556
  Top w0.508: JP1.8@35.509,3.886 34.303,5.093 34.303,11.62 v2(33.909,12.014) 37.287,15.392 37.287,18.593 v1(37.389,18.694) 38.76,18.694 40.208,20.142 40.208,22.479 v1(39.853,22.835)
  Signal w0.254: v2(16.027,29.616) 17.424,28.219 v1(18.517,28.219)
  Signal w0.381: v1(10.668,13.818) 10.689,13.818 10.968,13.538 v1(25.349,13.538) 26.797,12.09 27.153,12.09 27.229,12.014 v2(33.909,12.014)
  Signal w0.762: v1(9.601,19.66) 9.601,22.504 13.843,26.746 ; v2(13.843,29.616) 13.843,26.746 ; JP2.8@35.509,43.764 33.517,41.772 9.071,41.772 7.239,39.94 7.239,37.236 10.058,34.417 10.058,29.591 12.903,26.746 13.843,26.746
  Bottom w0.152: C8.2@4.75,16.713 5.232,16.231 6.096,16.231 6.223,16.358 6.223,17.247 ; R15.2@5.74,17.729 6.223,17.247 ; C9.2@7.747,17.729 7.925,17.729 7.595,17.399 7.341,17.399 7.188,17.247 6.223,17.247 ; C20.2@17.116,22.965 17.12,22.962 17.78,22.962 17.831,23.013 18.279,23.013 U5.50@18.81,23.543 ; v1(25.349,13.538) 25.349,13.73 C24.2@25.901,14.282 25.901,14.331 26.941,15.372 U5.27@26.941,15.411 ; U5.75@27.295,34.256 27.295,34.296 26.703,34.889 C17.2@26.703,35.847 v2(27.425,35.847) v2@27.432,35.839 ; U5.11@34.473,20.008 35.253,19.228 v1(35.281,19.228) ; U5.6@36.241,21.775 36.241,21.735 37.32,20.656 C22.2@37.32,20.581 38.049,19.852 38.049,19.355 v1(37.389,18.694) 37.233,18.538 C21.2@36.698,18.538 ; U5.100@38.008,25.771 38.048,25.771 38.744,26.467 C19.2@39.497,26.467 ; v1(39.192,25.806) 39.192,26.089 39.497,26.394 C19.2@39.497,26.467 ; v1(39.853,22.835) 39.878,22.86 39.878,26.086 C19.2@39.497,26.467 ; v1(53.162,40.691) 53.245,40.691 53.524,40.97 R13.2@57.48,40.97 57.48,41.422 ; 57.48,34.277 59.093,34.277 v1(59.969,35.154) ; R10.2@57.48,41.978 57.48,41.422 ; JP5.1@59.578,39.735 59.254,40.059 59.254,40.969 58.77,41.453 57.511,41.453 57.48,41.422
  Bottom w0.254: R14.2@8.255,38.633 8.28,38.659 8.28,39.294 8.56,39.573 11.201,39.573 11.443,39.332 11.468,39.332 ; R3.2@11.468,38.633 11.468,39.332 ; v2(13.843,29.616) v2(16.027,29.616) ; v2@13.843,29.743 13.614,29.972 13.614,32.995 14.33,33.71 v2(14.33,36.885) 14.335,36.89 14.335,37.1 13.716,37.719 R2.2@13.716,38.633 13.716,39.268 13.462,39.522 11.659,39.522 11.468,39.332 ; R11.2@57.48,34.773 57.48,34.277 R12.2@57.48,33.782 56.018,32.319 55.171,32.319 U6.2@53.558,30.707 55.122,29.144 58.018,29.144 59.578,27.584 JP8.1@59.978,27.584
  Bottom w0.381: L1.2@9.119,19.761 11.481,19.761 v2(13.741,22.022) 16.173,22.022 C20.2@17.116,22.965 ; D4.2@9.144,18.401 9.144,18.316 10.668,16.792 v1(10.668,14.681) v1(10.668,13.818) ; JP1.8@35.509,3.886 36.83,5.207 43.995,5.207 44.346,5.558 44.346,5.576 44.621,5.851 U3.2@46.292,5.851
  Bottom w0.508: L2.2@32.963,12.935 32.976,12.935 33.896,12.014 v2(33.909,12.014) ; JP1.8@35.509,3.886 JP1.6@38.049,3.886 ; JP2.8@35.509,43.764 JP2.6@38.049,43.764 ; R11.2@57.48,34.773 57.48,37.762 59.01,39.291 59.135,39.291 59.578,39.735 JP5.1@59.978,39.735
  other v1: 10.643,15.57 5.74,17.958 8.534,18.872 9.601,18.898 8.611,19.685
+5V: C1.1 C6.2 C11.2 F1.2 JP1.2 JP1.4 JP2.2 JP2.4 JP11.1 JP12.1 U1.7 U1.8 U2.1 U2.4 U4.3 | length 189.2
  Top w0.508: JP2.4@40.589,43.764 JP2.2@43.129,43.764 46.052,40.841 47.22,40.841 49.479,38.583 U4.3@49.479,36.798 ; JP12.1@50.029,5.3 50.029,3.54 v2(50.038,3.531) ; v1(52.07,39.726) 52.222,39.878 C11.2@52.502,39.878 ; v2@59.919,8.687 v2(59.927,8.696) JP11.1@59.927,9.795
  Bottom w0.152: C1.1@2.896,9.246 4.039,9.246 4.494,9.701 U1.7@4.494,10.401 4.494,10.731 4,11.225 U1.8@3.67,11.225 ; 5.273,21.047 6.749,19.571 6.999,19.571 7.173,19.397 U2.4@7.173,19.147
  Bottom w0.254: v1(49.53,38.583) 50.927,38.583 v1(52.07,39.726)
  Bottom w0.508: C1.1@2.896,9.246 2.896,7.925 2.743,7.772 2.743,7.74 2.446,7.442 1.288,7.442 ; JP2.2@43.129,43.764 45.415,46.05 45.415,46.99 44.12,48.285 6.858,48.285 5.842,47.269 5.842,47.006 5.983,46.866 5.983,37.337 3.607,34.962 3.607,31.725 2.946,31.064 2.946,25.346 4.847,23.445 4.85,23.445 C6.2@5.283,23.012 5.273,23.002 U2.1@5.273,21.747 5.273,21.047 5.273,20.691 0.991,16.408 0.991,7.74 1.288,7.442 ; v2(59.927,8.696) 59.927,6.816 59.055,5.944 59.055,2.692 58.699,2.337 51.232,2.337 v2(50.038,3.531) 48.565,2.057 44.958,2.057 JP1.2@43.129,3.886 JP1.4@40.589,3.886 38.354,1.651 3.632,1.651 1.288,3.995 1.288,7.442
  other v1: 8.509,23.8 7.747,23.825 8.509,24.486 7.772,24.511
BLE_KEY: U3.12 U5.82 | length 44.8
  Top w0.152: v1(32.664,33.172) 33.325,33.833 35.916,33.833 35.966,33.782 38.329,33.782 41.554,30.556 v1(41.554,28.397)
  Bottom w0.152: U5.82@31.644,32.135 32.664,33.155 v1(32.664,33.172) ; v1(41.554,28.397) 41.554,28.36 41.25,28.055 41.25,16.713 41.707,16.256 47.32,16.256 53.225,10.351 U3.12@57.492,10.351
BOOT0: R20.1 U5.94 | length 1.6
  Bottom w0.152: U5.94@35.887,27.892 35.887,27.932 36.95,28.995 R20.1@36.95,29.039
CAN_RX: U4.4 U5.70 | length 30.5
  Top w0.152: v1(49.962,35.204) 50.749,35.992 U4.4@50.749,36.798
  Signal w0.152: v1(27.463,29.749) 28.27,30.556 34.468,30.556 37.541,33.63 44.425,33.63 45.377,34.582 45.936,34.582 46.914,35.56 47.447,35.56 47.803,35.204 v1(49.962,35.204)
  Bottom w0.152: U5.70@25.527,32.489 27.457,30.559 27.457,29.755 v1(27.463,29.749)
CAN_TX: U4.1 U5.71 | length 27.5
  Top w0.152: U4.1@46.939,36.798 46.939,35.255 v1(47.193,35.001)
  Signal w0.152: v1(28.143,29.743) 30.483,29.743 30.94,30.201 34.62,30.201 37.516,33.096 45.847,33.096 47.193,34.442 v1(47.193,35.001)
  Bottom w0.152: U5.71@25.881,32.842 28.143,30.58 v1(28.143,29.743)
CANH: JP6.2 JP9.2 R19.2 U4.7 | length 29
  Top w0.152: U4.7@48.209,42.298 48.209,43.51 48.362,43.663 51.079,43.663 51.511,43.231 51.511,39.04 51.867,38.684 R19.2@52.527,38.684 52.527,38.075 52.68,37.922 54.229,37.922 55.22,38.913 55.22,44.968 JP6.2@55.26,45.009 55.036,45.233 55.036,46.208 54.686,46.558 49.251,46.558 48.92,46.228 48.92,45.146 JP9.2@48.783,45.009
CANL: JP6.1 JP9.1 R19.1 U4.6 | length 23.8
  Top w0.152: v1@47.523,46.279 v1(47.528,46.274) 47.534,46.269 JP9.1@47.534,45.009 47.534,41.29 48.285,40.538 49.225,40.538 49.479,40.792 U4.6@49.479,42.298 ; v1(53.01,45.009) JP6.1@54.011,45.009 54,44.999 54,43.713 54.597,43.116 54.597,39.738 R19.1@53.543,38.684
  Bottom w0.152: v1(47.528,46.274) 47.528,46.83 47.714,47.015 49.124,47.015 51.13,45.009 v1(53.01,45.009)
GND: 1.1 1.5 1.6 1.12 C1.2 C2.1 C3.1 C4.1 C5.1 C6.1 C7.1 C9.1 C10.1 C11.1 C12.1 C13.2 C14.1 C15.1 C16.2 C17.1 C18.2 C19.1 C20.1 C21.1 C22.1 C24.1 D3.1 D4.1 D5.2 D7.2 JP1.1 JP1.3 JP1.5 JP1.7 JP2.1 JP2.3 JP2.5 JP2.7 JP3.1 JP4.4 JP5.4 JP7.5 JP8.5 JP10.4 JP11.4 JP12.4 K1.2 K2.2 K3.2 K4.2 K5.2 O1.2 O1.4 R1.2 R4.1 R5.1 R16.1 R17.1 R20.2 U1.3 U1.29 U2.2 U3.1 U4.2 U4.8 U5.10 U5.19 U5.26 U5.49 U5.74 U5.99 U6.5 USB1.1 USB1.2 USB1.3 USB1.4 USB1.A1 USB1.A12 USB1.B1 USB1.B12 | length 90
  Top w0.152: v2(14.402,32.233) C3.1@14.402,32.766 ; v1(43.371,12.751) 43.371,11.036 R17.1@44.094,10.312 ; D7.2@44.689,35.662 44.689,34.409 44.933,34.165 C16.2@44.933,34.138 45.669,34.138 v1@45.695,34.112 ; v1(46.787,43.713) 46.939,43.561 U4.8@46.939,42.298 ; C13.2@53.492,42.266 53.492,42.901 v1(53.518,42.926) ; JP4.4@59.969,39.7 59.969,40.716 v1@59.995,40.742
  Top w0.381: v1(2.362,14.681) 5.125,14.681 JP10.4@5.182,14.625 ; USB1.4@5.773,24.352 5.967,24.352 6.253,24.638 6.253,25.286 6.294,25.327 USB1.A12@6.813,25.327 ; USB1.3@5.773,33.002 5.967,33.002 6.253,32.716 6.253,32.067 6.294,32.027 USB1.A1@6.813,32.027 ; D5.2@8.255,38.633 8.255,37.998 v1(9.398,36.855) ; v1(9.804,13.995) 9.804,13.374 12.142,11.037 K1.2@12.192,11.037 13.475,11.037 C2.1@14.478,12.04 ; K3.2@12.167,24.943 13.716,24.943 ; v1(12.192,17.92) 13.514,17.92 14.148,18.555 14.414,18.555 C5.1@14.478,18.618 ; v1(14.097,23.571) 13.716,23.952 13.716,24.943 ; C4.1@14.453,25.679 13.716,24.943 ; v1(18.745,29.083) 20.895,31.233 21.657,31.233 21.666,31.242 1.1@21.666,31.979 ; v1(24.079,27.864) 24.466,28.251 1.5@24.466,31.979 1.6@25.166,31.979 ; 1.12@29.366,31.979 29.366,31.175 29.376,31.166 v1(30.277,31.166) ; U4.2@48.209,36.798 48.209,34.671 v1(48.412,34.468) ; C11.1@53.518,39.878 53.554,39.914 54.037,39.914 v1(54.051,39.929) ; v1@53.721,3.937 v1(53.779,3.995) JP12.4@53.779,5.3 ; v1(59.411,29.058) 59.978,28.49 JP7.5@59.978,27.556 ; JP11.4@59.927,13.545 v1(61.156,13.545) v1@61.163,13.538
  Bottom w0.152: v1(1.854,8.534) R1.2@1.854,10.287 ; v1(3.556,23.012) C6.1@4.267,23.012 ; v1(3.81,26.924) 3.835,26.949 R4.1@4.47,26.949 ; v1(3.886,29.896) R5.1@4.496,29.896 ; v1(6.223,20.93) U2.2@6.223,21.747 ; U1.3@6.494,10.401 6.498,10.397 6.498,9.478 v1(6.502,9.474) ; R16.1@6.756,16.713 C9.1@7.747,16.713 8.472,16.713 8.72,16.465 8.805,16.465 9.144,16.126 D4.1@9.144,16.041 9.869,16.041 v1(9.881,16.053) ; v1(9.957,25.552) C7.1@9.957,26.238 ; v1(17.297,20.422) 17.348,20.422 C12.1@17.827,20.901 17.831,20.904 C20.1@17.831,22.243 ; v1@17.323,21.742 17.33,21.742 C20.1@17.831,22.243 ; U5.49@19.163,23.19 18.608,22.634 18.222,22.634 C20.1@17.834,22.247 C20.1@17.831,22.243 ; C10.1@24.656,35.161 24.772,35.161 v1(25.298,35.687) 25.362,35.687 25.921,35.128 C17.1@25.984,35.128 25.984,34.921 26.143,34.762 26.143,34.701 U5.74@26.941,33.903 ; v1(27,13.157) 27,13.183 C24.1@26.619,13.564 26.619,14.342 27.295,15.018 U5.26@27.295,15.058 ; U5.19@31.644,17.179 32.995,15.829 C18.2@32.995,14.884 32.995,14.173 33.659,13.509 C14.1@34.395,13.509 34.515,13.509 35.241,14.235 v1(35.241,14.963) ; U5.10@34.826,20.361 34.842,20.361 35.947,19.257 C21.1@35.979,19.257 36.585,19.863 C22.1@36.601,19.863 v1(37.084,19.38) ; U5.99@37.655,26.125 37.686,26.125 38.747,27.185 C19.1@38.779,27.185 38.818,27.185 v1(39.141,27.508) ; R20.2@37.668,28.321 37.998,28.651 v1(38.049,28.651) ; C15.1@38.104,17.167 38.104,17.116 v1(38.557,16.662)
  Bottom w0.254: v1(59.131,35.128) 59.305,35.302 59.305,35.712 59.578,35.985 JP5.4@59.978,35.985
  Bottom w0.381: USB1.3@5.773,33.002 5.891,32.883 7.218,32.883 8.687,31.415 D3.1@8.687,31.33 ; v1(58.445,21.641) 58.635,21.641 59.578,22.584 JP8.5@59.978,22.584
  other v1: 45.669,4.293 46.939,4.572 5.994,12.725 35.524,17.65 17.326,21.742 45.682,34.125 59.982,40.729
  other v2: 12.141,32.055
I2C1_SCL: JP4.3 R13.1 U5.92 | length 34.5
  Top w0.152: v1(58.522,40.488) 58.522,39.218 58.965,38.774 59.646,38.774 JP4.3@59.969,38.45
  Signal w0.152: v1(35.966,30.124) 36.017,30.175 38.79,30.175 40.669,32.055 42.277,32.055 42.607,32.385 48.743,32.385 52.019,35.662 57.531,35.662 58.547,36.678 58.547,40.462 v1(58.522,40.488)
  Bottom w0.152: U5.92@35.18,28.6 35.966,29.386 v1(35.966,30.124) ; R13.1@58.496,40.97 58.496,40.513 v1(58.522,40.488) v1@58.547,40.462
I2C1_SDA: JP4.2 R11.1 U5.93 | length 29.7
  Top w0.152: v1(58.496,35.255) 58.496,36.424 58.949,36.876 59.646,36.876 JP4.2@59.969,37.2
  Signal w0.152: v1(36.424,29.718) 38.764,29.718 40.796,31.75 42.916,31.75 43.119,31.953 49.184,31.953 52.486,35.255 v1(58.496,35.255)
  Bottom w0.152: U5.93@35.533,28.246 35.561,28.246 36.259,28.944 36.259,29.07 36.246,29.083 36.246,29.235 36.365,29.355 36.365,29.66 v1(36.424,29.718) ; R11.1@58.496,34.773 v1(58.496,35.255)
I2C2_SCL: JP5.3 R12.1 U5.46 | length 57.9
  Signal w0.152: v1(21.641,23.571) 25.857,19.355 27.927,19.355 28.423,18.859 28.423,18.821 29.235,18.009 32.106,18.009 33.807,16.307 36.932,16.307 40.284,19.66 48.107,19.66 58.496,30.049 v1(58.496,32.969)
  Bottom w0.152: U5.46@20.224,22.129 21.641,23.546 v1(21.641,23.571) ; v1(58.496,32.969) R12.1@58.496,33.782 59.893,33.782 61.252,35.141 61.252,35.268 61.214,35.306 61.214,37.059 61.038,37.235 JP5.3@59.978,37.235
I2C2_SDA: JP5.2 R10.1 U5.47 | length 70.7
  Signal w0.152: v1(20.828,23.444) 21.412,24.028 22.086,24.028 26.379,19.736 28.219,19.736 29.261,18.694 32.004,18.694 34.011,16.688 36.855,16.688 40.132,19.964 47.981,19.964 57.81,29.794 57.81,33.35 59.017,34.557 60.592,34.557 60.998,34.963 60.998,41.059 59.487,42.57 v1(58.496,42.57)
  Bottom w0.152: U5.47@19.87,22.483 20.828,23.44 v1(20.828,23.444) ; v1(58.496,42.57) R10.1@58.496,41.978 59.8,41.978 61.265,40.513 61.265,38.938 61.135,38.809 60.302,38.809 JP5.2@59.978,38.485
KEY1: C3.2 K2.1 R7.1 U5.4 | length 38.7
  Top w0.152: K2.1@12.141,36.855 12.191,36.855 12.815,36.231 12.815,36.207 13.894,35.128 R7.1@14.376,35.128 14.389,35.115 14.389,33.795 C3.2@14.402,33.782
  Signal w0.152: v1(12.09,36.855) 12.827,36.855 20.819,28.863 21.302,28.863 29.007,21.158 38.151,21.158 v1(38.202,21.209)
  Bottom w0.152: U5.4@36.948,22.483 38.202,21.229 v1(38.202,21.209)
KEY2: C4.2 K3.1 R8.1 U5.5 | length 37.4
  Top w0.152: K3.1@12.167,29.743 12.217,29.743 13.969,27.991 R8.1@14.453,27.991 C4.2@14.453,26.695
  Signal w0.152: v1(12.116,29.743) 12.751,30.378 18.466,30.378 28.143,20.701 38.01,20.701 38.29,20.422 v1(38.372,20.422)
  Bottom w0.152: U5.5@36.594,22.129 38.301,20.422 v1(38.372,20.422)
KEY3: C5.2 K4.1 R9.1 U5.7 | length 30.4
  Top w0.152: K4.1@12.192,22.72 12.242,22.72 12.866,22.096 12.866,21.754 13.64,20.98 R9.1@14.453,20.98 14.465,20.968 14.465,19.647 C5.2@14.478,19.634
  Bottom w0.152: v1(12.243,22.657) 14.3,24.714 19.723,24.714 20.231,24.206 21.844,24.206 22.784,23.266 34.061,23.266 v1(34.849,22.479) 34.849,22.46 U5.7@35.887,21.422
LED1: D1.2 U5.8 | length 29.1
  Top w0.152: D1.2@13.716,38.633 v1(14.707,38.633)
  Signal w0.152: v1(14.707,38.633) 18.749,34.591 18.875,34.591 22.859,30.607 25.959,30.607 v1(33.985,22.581)
  Bottom w0.152: v1(33.985,22.581) 34.021,22.581 U5.8@35.533,21.068
LED2: D2.2 U5.9 | length 31.7
  Top w0.152: D2.2@11.468,38.633 11.468,38.606 11.748,38.326 11.748,38.103 v1(11.807,38.045)
  Signal w0.152: v1(11.807,38.045) 12.319,38.557 13.246,38.557 13.627,38.176 14.351,38.176 18.241,34.286 18.749,34.286 22.936,30.099 25.781,30.099 v1(34.239,21.641)
  Bottom w0.152: v1(34.239,21.641) 35.165,20.715 U5.9@35.18,20.715
Net1_2: 1.2 R21.1 | length 24.4
  Top w0.254: 1.2@22.366,31.979 22.366,32.795 22.587,33.015 22.587,33.052 22.961,33.426 27.178,33.426 28.169,34.417 38.354,34.417 R21.1@43.256,39.319
NetC8_1: C8.1 R15.1 R16.2 U2.5 | length 5
  Bottom w0.152: U2.5@5.273,19.147 U2.5@5.273,18.897 ; R15.1@5.74,16.713 5.74,16.726 4.75,17.716 C8.1@4.75,17.729 5.273,18.252 U2.5@5.273,18.897 ; R16.2@6.756,17.729 5.762,18.723 5.447,18.723 U2.5@5.273,18.897
NetC10_2: C10.2 U5.73 | length 1.6
  Bottom w0.152: C10.2@25.375,34.442 25.394,34.423 25.714,34.423 U5.73@26.588,33.549
NetC12_2: C12.2 U5.48 | length 1.6
  Bottom w0.152: C12.2@18.546,21.619 18.958,22.032 18.958,22.278 U5.48@19.517,22.836
NetC13_1: C13.1 R18.2 U4.5 | length 4.8
  Top w0.152: v1(50.749,40.716) U4.5@50.749,42.298 ; v1(52.032,40.615) 52.045,40.615 R18.2@52.502,41.072 52.489,41.084 52.489,42.253 C13.1@52.476,42.266
  Bottom w0.152: v1(50.749,40.716) 51.848,40.716 51.949,40.615 v1(52.032,40.615)
NetC18_1: C18.1 L2.1 U5.20 U5.21 | length 3.8
  Bottom w0.152: U5.21@30.937,16.472 U5.20@31.291,16.826 32.257,15.86 32.257,15.622 C18.1@32.276,15.603 32.276,14.763 L2.1@31.706,14.192
NetD1_1: D1.1 R2.1 | length 1.1
  Top w0.254: v1(12.7,38.1) D1.1@12.7,38.633
  Bottom w0.254: v1(12.7,38.1) R2.1@12.7,38.633
NetD2_1: D2.1 R3.1 | length 1.2
  Top w0.254: D2.1@10.452,38.633 10.452,38.062 v1(10.458,38.056) v1@10.465,38.049
  Bottom w0.254: R3.1@10.452,38.633 10.455,38.63 10.455,38.059 v1(10.458,38.056)
NetD5_1: D5.1 R14.1 | length 1.2
  Top w0.254: v1(9.271,38.049) D5.1@9.271,38.633
  Bottom w0.254: v1(9.271,38.049) R14.1@9.271,38.633
NetD6_1: D6.1 U3.11 | length 13.5
  Top w0.152: D6.1@45.11,9.22 52.984,9.22 55.474,11.709 v1(55.956,11.709)
  Bottom w0.152: v1(55.956,11.709) 56.039,11.709 56.18,11.851 U3.11@57.492,11.851
NetD6_2: D6.2 R17.2 | length 1.5
  Top w0.152: D6.2@44.094,9.22 44.964,10.09 44.964,10.166 R17.2@45.11,10.312
NetD7_1: D7.1 R22.1 R23.1 | length 2.6
  Top w0.152: D7.1@42.789,35.662 42.756,35.629 42.756,34.171 R22.1@42.723,34.138 R23.1@43.815,34.138
NetD7_3: D7.3 R21.2 | length 1.6
  Top w0.152: D7.3@43.739,37.93 43.739,38.205 44.272,38.738 R21.2@44.272,39.319
NetK5_1: K5.1 U3.16 | length 13.6
  Top w0.152: K5.1@48.171,12.751 48.298,12.624 v1(49.352,12.624)
  Bottom w0.152: v1(49.352,12.624) 49.911,12.624 50.419,12.116 50.419,10.824 56.892,4.351 U3.16@57.492,4.351
NetL1_1: L1.1 U2.3
NetR1_1: R1.1 U1.9 | length 2
  Bottom w0.152: R1.1@2.87,10.287 2.87,11.339 3.18,11.649 3.594,11.649 U1.9@3.67,11.725
NetR4_2: R4.2 USB1.B5 | length 1
  Top w0.152: v1@5.867,26.899 5.895,26.927 USB1.B5@6.813,26.927
  other v1: 5.881,26.913
NetR5_2: R5.2 USB1.A5 | length 0.9
  Top w0.152: v1@5.867,29.921 5.873,29.927 USB1.A5@6.813,29.927
  other v1: 5.87,29.924